# Altium PCB STM32RF_PCB.PcbDoc
Units mm, origin at the board's own origin, x right, y up, seen from the top; angles counter-clockwise.
Board outline 50 x 28.5 mm, 4 copper layers (Top Layer, Int1 (GND), Int2 (PWR), Bottom Layer), stack 1.586 mm thick; 72 components, 54 nets, 253 pads, 278 vias.
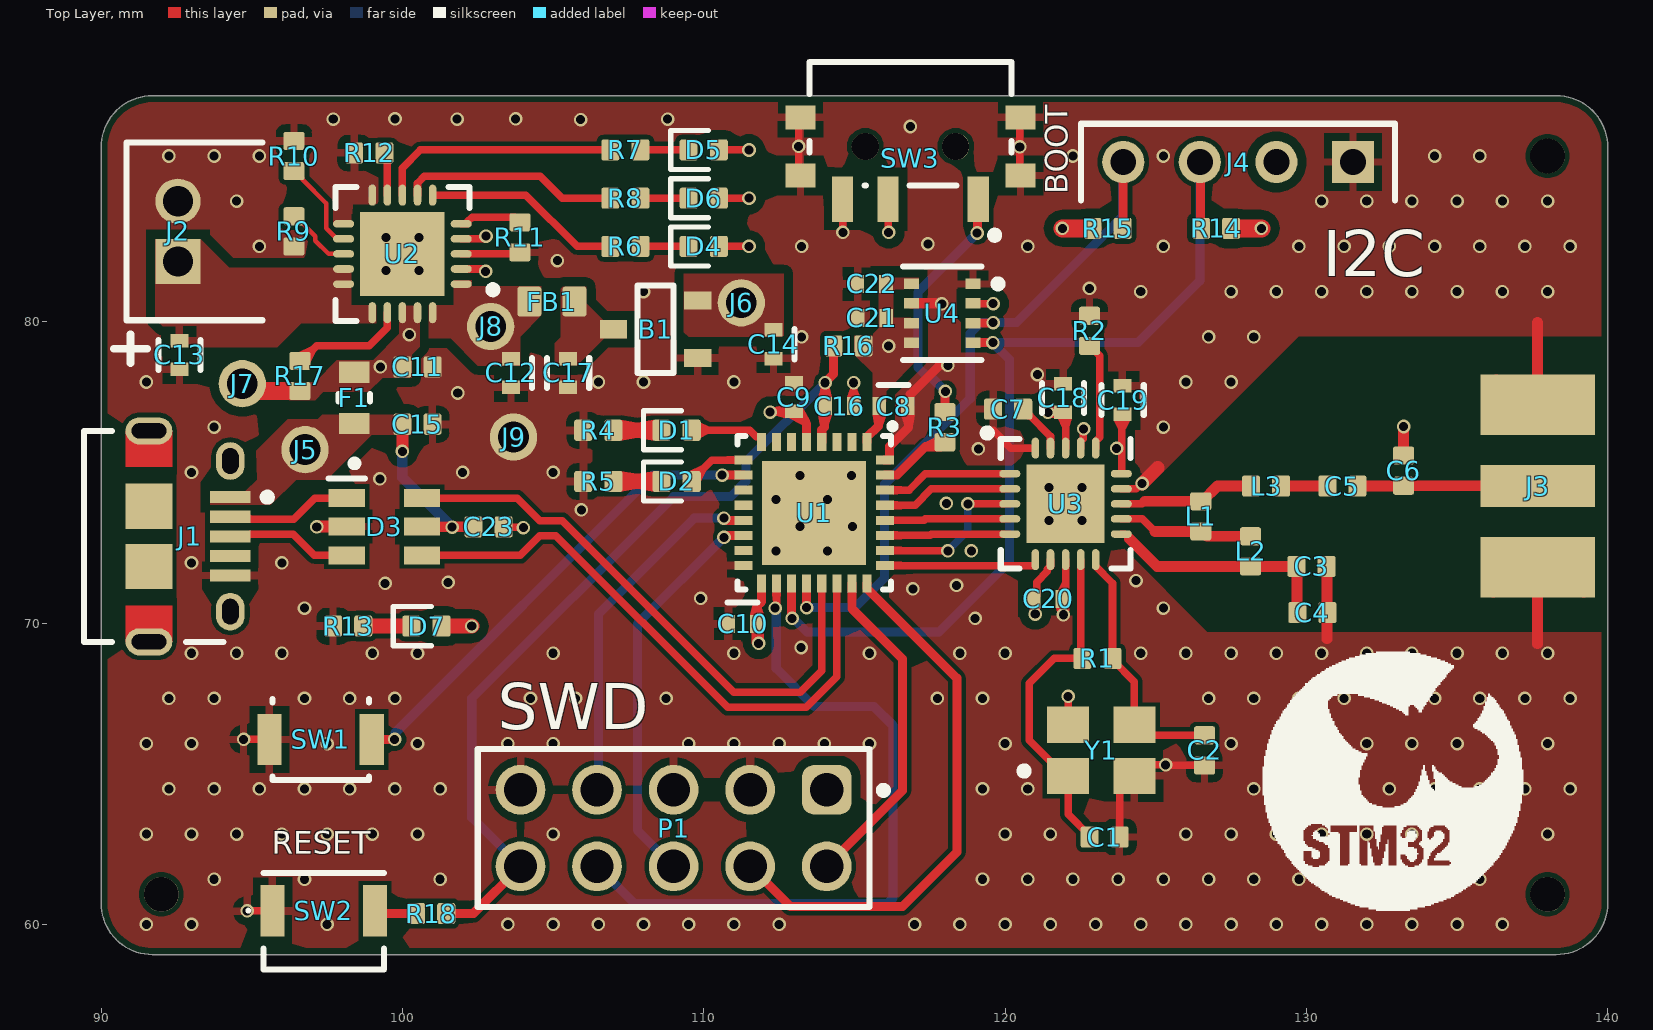
[diagram p0: Top Layer view]
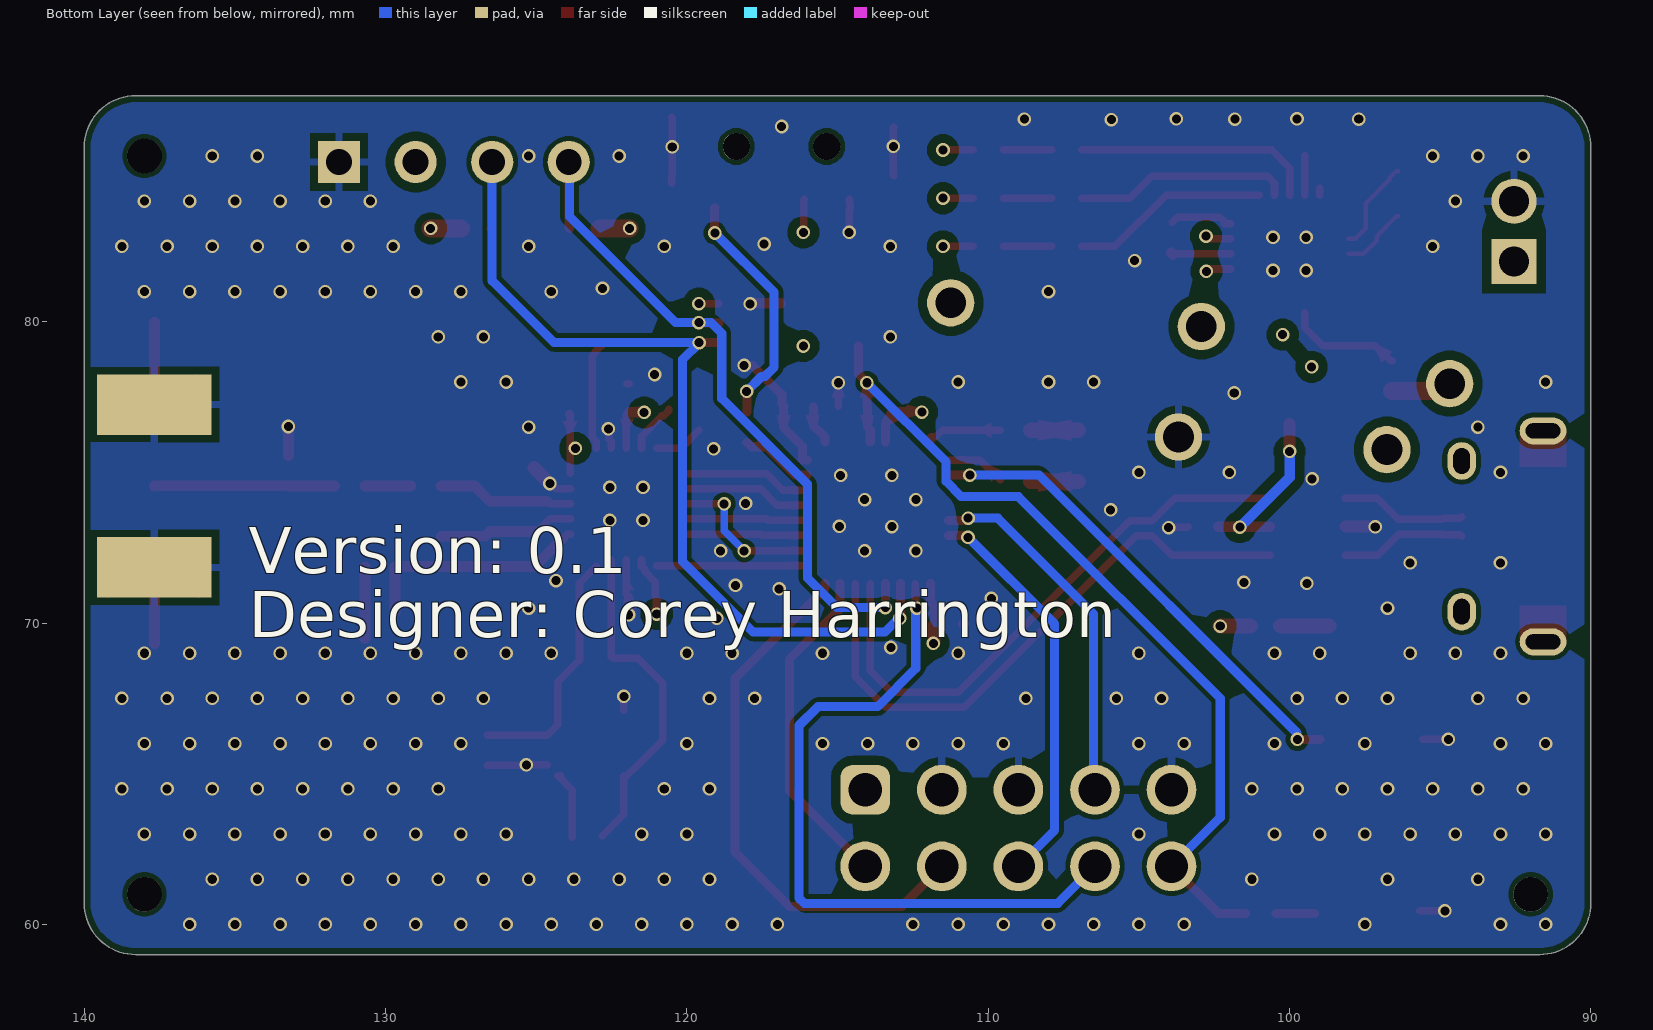
[diagram p1: Bottom Layer view, seen from below]
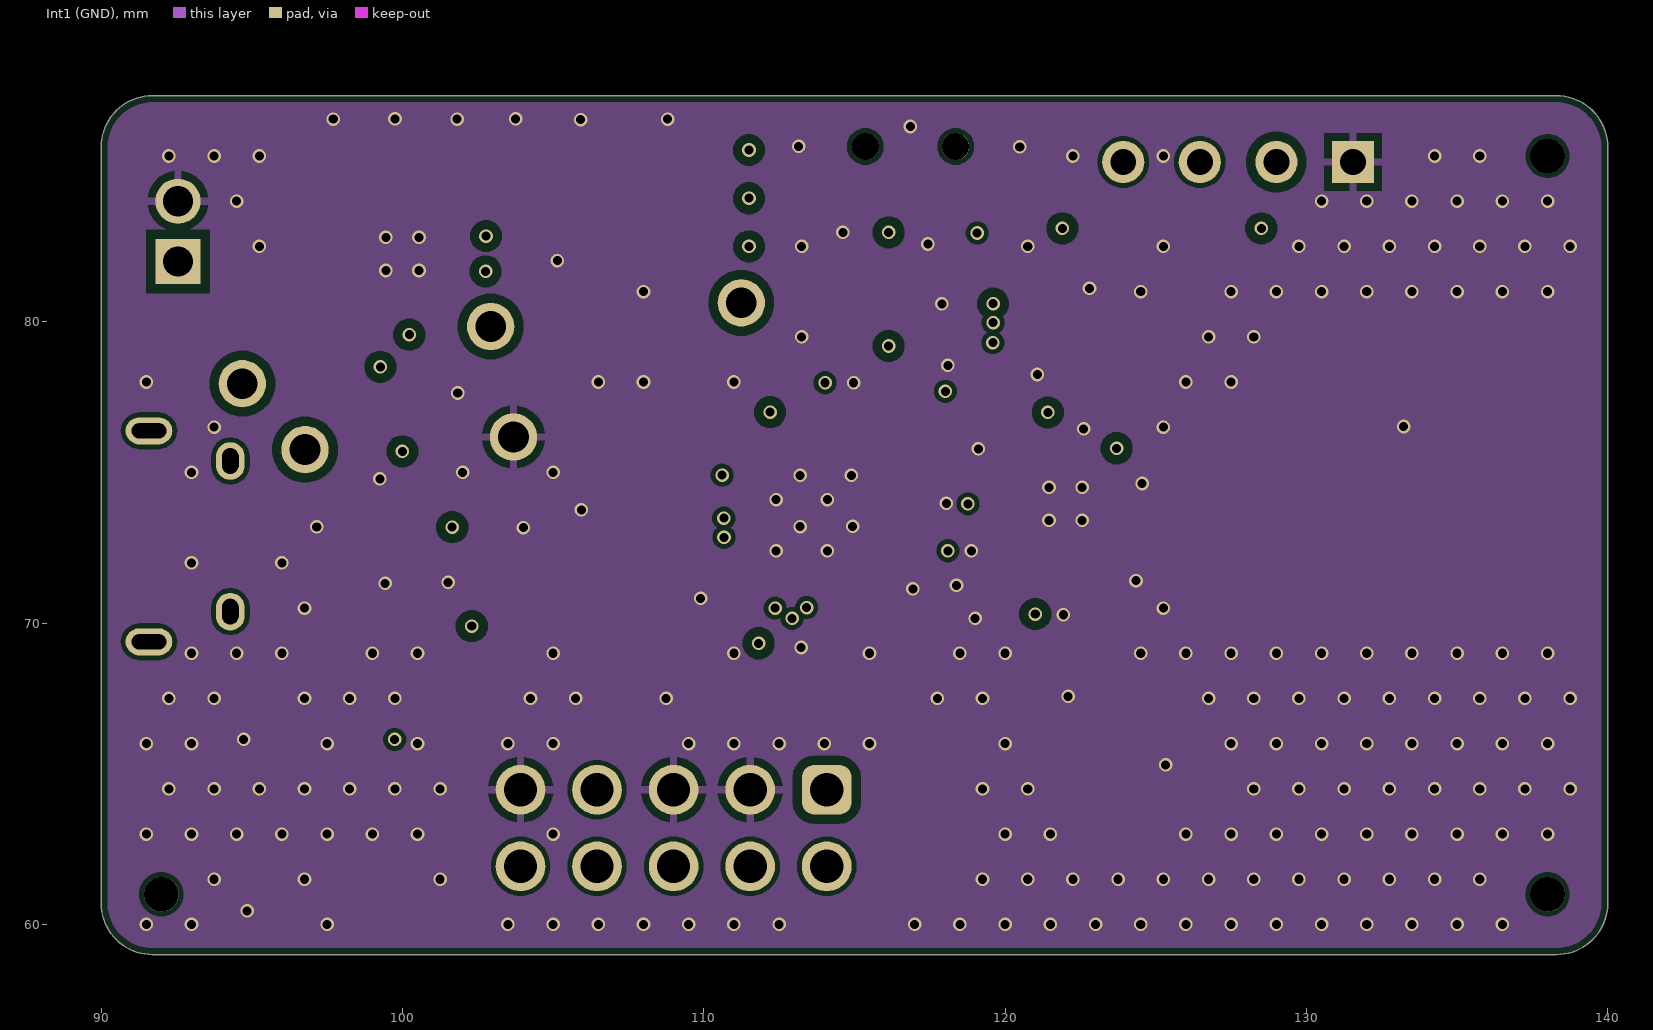
[diagram p2: Int1 (GND)]
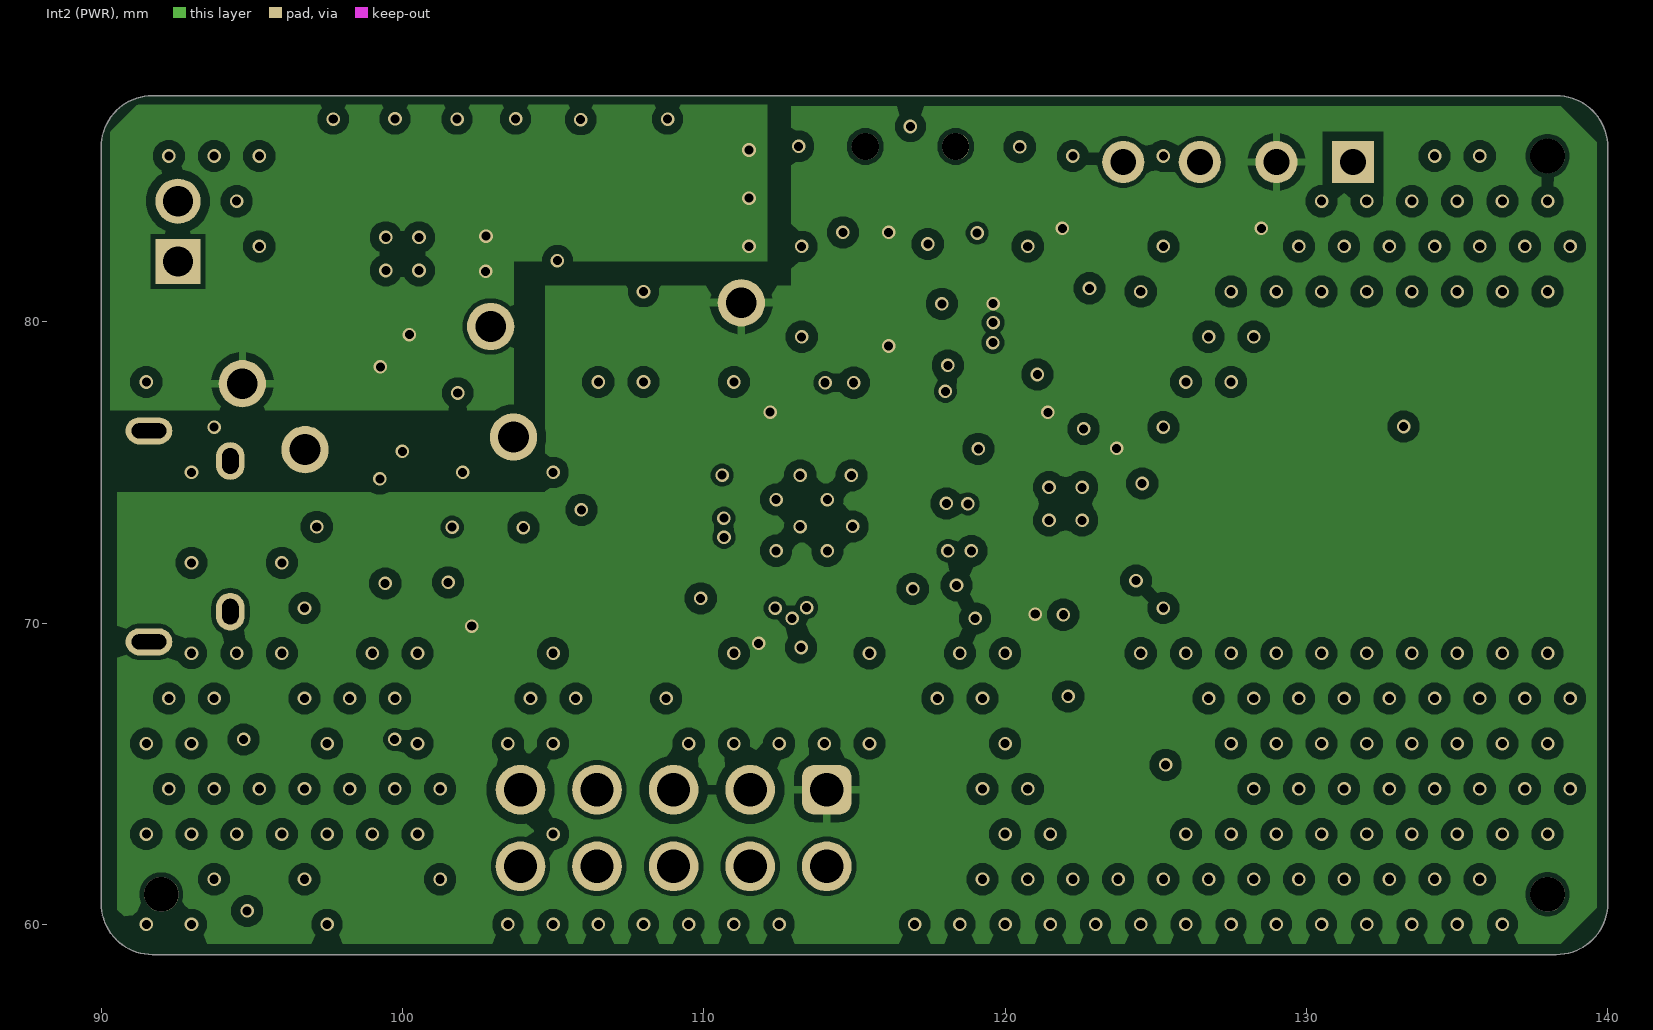
[diagram p3: Int2 (PWR)]
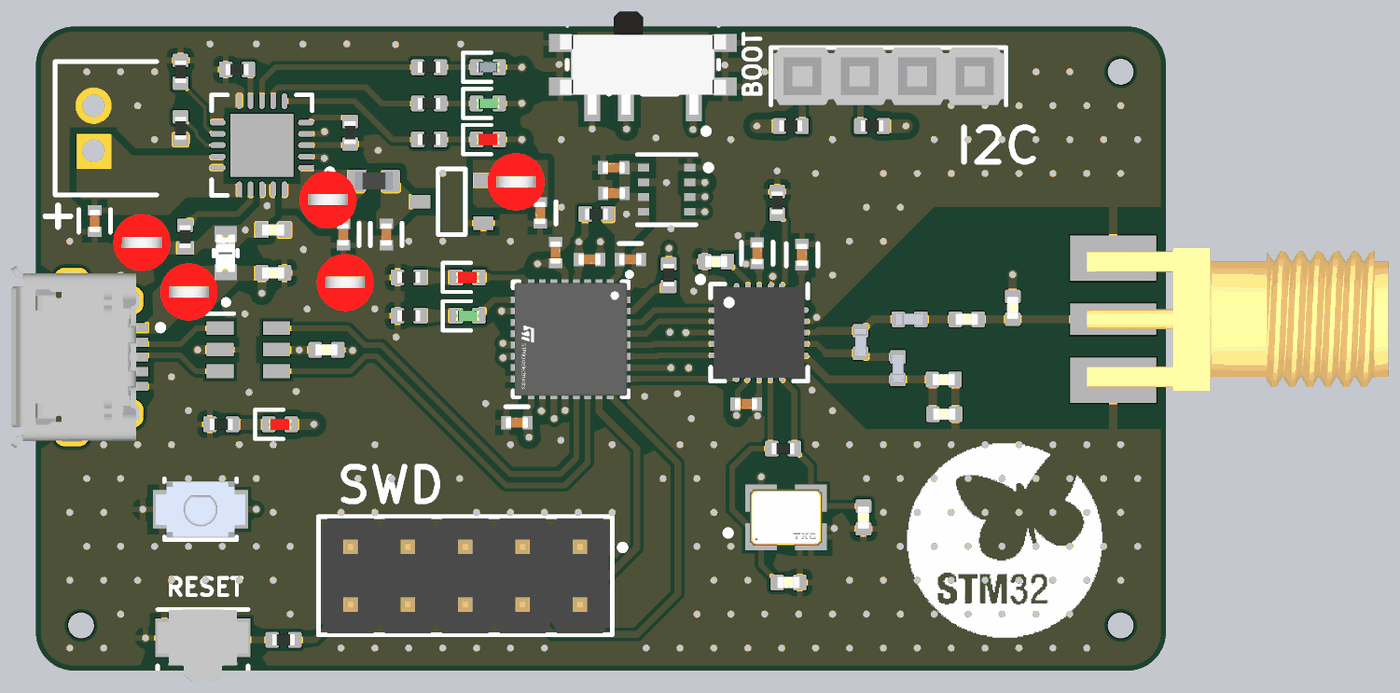
[diagram p4: 3D render of the assembled board from above, using the file's embedded part models]

## Layer stack, top to bottom
Top Solder: solder mask 0.0152, SM-001, Dk 3.8
Top Layer: signal copper 0.035
Dielectric 1: prepreg 0.2104, PP-023, Dk 4.4
Int1 (GND): signal copper 0.0152
Dielectric 3: core 1.065, Core-042, Dk 4.6
Int2 (PWR): signal copper 0.0152
Dielectric 5: prepreg 0.2104, PP-023, Dk 4.4
Bottom Layer: signal copper 0.035
Bottom Solder: solder mask 0.0152, SM-001, Dk 3.8

## Board outline
90.5,59.5 cw(c91.707,60.707) 90,60.707 90,85.793 cw(c91.707,85.793) 90.5,87 cw(c91.707,85.793) 91.707,87.5 138.293,87.5 cw(c138.293,85.793) 139.5,87 cw(c138.293,85.793) 140,85.793 140,60.707 cw(c138.293,60.707) 139.5,59.5 cw(c138.293,60.707) 138.293,59 91.707,59 cw(c91.707,60.707)

## Design rules (kind name [scope] priority, off if disabled: settings)
BoardOutlineClearance [All] p1: gap=0.22 ignorepadtopadclearanceinfootprint=FALSE
Clearance ClearanceGNDPoursPower_1 [InNet('GND') vs InNetClass('Power')] p1: gap=0.3 ignorepadtopadclearanceinfootprint=FALSE
Clearance [All] p2: gap=0.15 ignorepadtopadclearanceinfootprint=FALSE
DiffPairsRouting [All] p1: maxlimit=0.254 minlimit=0.203 mostfreqgap=0.254 toplayer_maxgap=0.203 toplayer_prefgap=0.203 toplayer_minwidth=0.253 toplayer_maxwidth=0.253 toplayer_prefwidth=0.253 bottomlayer_maxgap=0.203 bottomlayer_prefgap=0.203 bottomlayer_minwidth=0.253 bottomlayer_maxwidth=0.253 bottomlayer_prefwidth=0.253 impedanceprofiledriven=TRUE impedanceprofileid={286F65C9-C0EC-4DC8-95B2-A61B2A38E763} impedanceprofilevalue=90.000000 maxuncoupledlength=12.7
HoleSize [All] p1: absolutevalues=TRUE maxlimit=6.3 minlimit=0.19 maxpercent=80.000 minpercent=20.000
MatchedLengths [InDifferentialPair ('USB_D')] p1: tolerance=25.4 checknetsindiffpair=FALSE checkdiffpairvsdiffpair=TRUE checkxsignals=TRUE checkothers=TRUE
MinimumAnnularRing [All] p1: minimumring=0.07
MinimumSolderMaskSliver [All] p1: minsoldermaskwidth=0.11
PolygonConnect [All] p1: connectstyle=Relief reliefconductorwidth=0.254 reliefentries=4 polygonreliefangle="90 Angle" airgapwidth=0.254
RoutingVias [All] p1: holewidth=0.2 width=0.35 viastyle="Through Hole" minholewidth=0.2 minwidth=0.35 maxholewidth=6 maxwidth=6.15 viatemplateguid#1={0F43BBC7-26E7-4347-9C8E-C3F9A4934C02} viatemplatename#1=v35h15
SilkToSolderMaskClearance [IsPad] p1: minsilkscreentomaskgap=0.17 clearancetoexposedcopper=TRUE
SolderMaskExpansion SolderMaskExpansionMCP [InComponent('U2')] p1: expansion=0.025 istentingtop=FALSE
SolderMaskExpansion SolderMaskExpansionNRF [InComponent('U3')] p2: expansion=0.025 istentingtop=FALSE
SolderMaskExpansion [All] p3: expansion=0.05 istentingtop=FALSE
SupplyNets "Schematic Supply Nets_5" [InNet('VBUS')] p1: voltage=0.000
SupplyNets "Schematic Supply Nets_4" [InNet('GND')] p2: voltage=0.000
SupplyNets "Schematic Supply Nets_3" [InNet('VBUS_FUSED')] p3: voltage=0.000
SupplyNets "Schematic Supply Nets_2" [InNet('+3.3V')] p4: voltage=0.000
SupplyNets "Schematic Supply Nets_1" [InNet('VBUS_MCP_OUT')] p5: voltage=0.000
SupplyNets "Schematic Supply Nets" [InNet('VBAT')] p6: voltage=0.000
Width USB_FS [InNetClass('Differentials')] p1: maxlimit=0.254 minlimit=0.025 preferedwidth=0.254 toplayer_maxwidth=0.025 toplayer_prefwidth=0.025 bottomlayer_maxwidth=0.025 bottomlayer_prefwidth=0.025 impedanceprofiledriven=TRUE impedanceprofileid={286F65C9-C0EC-4DC8-95B2-A61B2A38E763} minimp=50.000000 maximp=50.000000 favimp=50.000000
Width 2.4GHzRF [InNetClass('2.4GHzRF')] p2: maxlimit=0.357 minlimit=0.254 preferedwidth=0.357 toplayer_minwidth=0.357 bottomlayer_minwidth=0.357 impedanceprofiledriven=TRUE impedanceprofileid={B9E9FB07-D802-41B6-95F4-58B4CA0E4322} impedanceprofilevalue=50.000000 minimp=50.000000 maximp=50.000000 favimp=50.000000
Width [All] p3: maxlimit=5 minlimit=0.12 preferedwidth=0.3 minimp=50.000000 maximp=50.000000 favimp=50.000000
26 further rules are at their usual default settings.

## Classes and differential pairs
net class Differentials: USB_CONN_D_N USB_CONN_D_P USB_D_N USB_D_P
net class Power: +3.3V VBAT VBUS VBUS_FILTERED VBUS_FUSED VBUS_MCP_OUT
net class 2.4GHzRF: ANT1 ANT2 ANT2_2 ANT2_SMA VDD_PA
component class U_STM32RF_PowerUSBSchDoc: B1 C11 C12 C13 C14 C15 C17 C23 D3 D4 D5 D6 D7 F1 FB1 J1 J2 J5 J6 J7 J8 J9 R6 R7 R8 R9 R10 R11 R12 R13 R17 U2
component class U_STM32RF_NRF: C1 C2 C3 C4 C5 C6 C7 C18 C19 C20 J3 L1 L2 L3 R1 R2 U3 Y1
component class U_STM32RF_MCU: C8 C9 C10 C16 D1 D2 P1 R3 R4 R5 R16 R18 SW1 SW2 SW3 U1
component class U_STM32RF_BME280: C21 C22 J4 R14 R15 U4
differential pair USB_D: +USB_D_P -USB_D_N
differential pair USB_CONN_D: +USB_CONN_D_P -USB_CONN_D_N

## Components (designator, comment, footprint, x,y, rotation, side; value= is the part's Value field where it differs from the comment)
B1 "XC6206P252MR-G" SOT95P280X130-3N 108.4,79.75 r180 top
C1 "22p" CAP_0402 123.3,62.9 r180 top
C2 "22p" CAP_0402 126.619,65.778 r90 top
C3 "2.2n" CAP_0402 130.167,71.882 r180 top
C4 "4.7p" CAP_0402 130.196,70.349 r180 top
C5 "1.5p" CAP_0402 131.191,74.549 r180 top
C6 "1.0p" CAP_0402 133.223,75.057 r270 top
C7 "33n" CAP_0402 120.1,77.1 r0 top
C8 "22uF" FP-GRM158-0_2-MFG 116.3,77.2 r0 top
C9 "22uF" FP-GRM158-0_2-MFG 113,77.5 r90 top
C10 "22uF" FP-GRM158-0_2-MFG 111.285,69.977 r180 top
C11 "4.7u" CAP_0402 100.5,78.5 r180 top
C12 "22uF" FP-GRM158-0_2-MFG 103.6,78.3 r270 top
C13 "22uF" FP-GRM158-0_2-MFG 92.6,78.9 r270 top
C14 "22uF" FP-GRM158-0_2-MFG 112.313,79.253 r270 top
C15 "4.7u" CAP_0402 100.5,76.6 r180 top
C16 "22uF" FP-GRM158-0_2-MFG 114.5,77.2 r0 top
C17 "22uF" FP-GRM158-0_2-MFG 105.5,78.3 r270 top
C18 "22uF" FP-GRM158-0_2-MFG 121.92,77.47 r90 top
C19 "22uF" FP-GRM158-0_2-MFG 123.9,77.4 r90 top
C20 "22uF" FP-GRM158-0_2-MFG 121.425,70.8 r0 top
C21 "22uF" FP-GRM158-0_2-MFG 115.579,80.128 r180 top
C22 "22uF" FP-GRM158-0_2-MFG 115.571,81.256 r180 top
C23 "100n" CAP_0402 102.859,73.195 r180 top
D1 "RED" LED_0402_RED 109.1,76.4 r180 top
D2 "GREEN" LED_0402_GREEN 109.1,74.7 r180 top
D3 "USBLC6-2SC6Y" SOT95P280X145-6N 99.4,73.2 r0 top
D4 "RED" LED_0402_RED 110,82.5 r180 top
D5 "BLUE" LED_0402_BLUE 110,85.7 r180 top
D6 "GREEN" LED_0402_GREEN 110,84.1 r180 top
D7 "RED" LED_0402_RED 100.8,69.9 r180 top
F1 "MF-FSMF050X-2" FP-MF-FSMF-MFG 98.4,77.475 r90 top value=0.1-0.8Ω
FB1 "100 @ 100MHz" FB_0603 104.961,80.67 r0 top
J1 "10118194-0001LF" FCI-10118194-0001LF-5_V 92.939,72.879 r270 top
J2 "B2B-PH-K-S(LF)(SN)" JST-B2B-PH-K-S_V 93.1,83 r90 top
J3 "CON-SMA-EDGE-S" CON-SMA-EDGE-S 137.668,74.549 r0 top
J4 "SLW-104-01-F-S" SMTC-SLW-104-01-X-S 131.54,85.3 r180 top
J5 "5000" FP-5000-MFG 96.77,75.757 r0 top
J6 "5000" FP-5000-MFG 111.245,80.628 r0 top
J7 "5000" FP-5000-MFG 94.689,77.945 r0 top
J8 "5000" FP-5000-MFG 102.928,79.843 r0 top
J9 "5000" FP-5000-MFG 103.687,76.173 r0 top
L1 "8.2n" IND_0402 126.492,73.541 r90 top
L2 "2.7n" IND_0402 128.143,72.382 r270 top
L3 "3.9n" IND_0402 128.659,74.549 r0 top
P1 "61301021121" 61301021121 109,63.2 r180 top
R1 "1M" RES_0402 123.063,68.826 r0 top
R2 "22K" RES_0402 122.8,79.7 r270 top
R3 "10K" RES_0402 118,76.5 r270 top
R4 "2K" RES_0402 106.5,76.4 r0 top
R5 "1K" RES_0402 106.5,74.7 r0 top
R6 "470" RES_0402 107.4,82.5 r0 top
R7 "470" RES_0402 107.4,85.7 r0 top
R8 "470" RES_0402 107.4,84.1 r0 top
R9 "2K" RES_0402 96.4,83 r90 top
R10 "20K" RES_0402 96.4,85.5 r270 top
R11 "10K" RES_0402 103.9,82.8 r90 top
R12 "10K" RES_0402 98.9,85.6 r0 top
R13 "2K" RES_0402 98.2,69.9 r0 top
R14 "3.3K" RES_0402 127,83.1 r0 top
R15 "3.3K" RES_0402 123.4,83.1 r180 top
R16 "10K" RES_0402 114.8,79.2 r0 top
R17 "10K" RES_0402 96.6,78.2 r270 top
R18 "100" RES_0402 100.955,60.363 r180 top
SW1 "B3U-1000P" FP-B3U-1000P-MFG 97.283,66.139 r0 top
SW2 "B3U-3000P" OMRON-B3U-3000P_V 97.388,60.457 r0 top
SW3 "PCM12SMTR" FP-PCM12SMTR-MFG 116.859,86.564 r180 top
U1 "STM32L432KBU6" FP-UFQFPN32-A0B8-MFG 113.665,73.66 r270 top
U2 "MCP73871-3CCI/ML" QFN-ML20_L 100,82.25 r180 top
U3 "NRF24L01P-T" NRSC-QFN-20_L 122.005,73.956 r0 top
U4 "BME280" FP-BME280-MFG 117.912,80.282 r0 top
Y1 "7M16000017" FP-7M-MFG 123.19,65.778 r0 top

## Footprints (in the part's own frame and the unit in brackets; to place one, negate y for a bottom-side part, rotate by r counter-clockwise, add the part's x,y. Pads: shape width x height; smd on the part's side, far side on the other; paste and mask are expansions set on the pad)
61301021121 [mm] "Pin Header, pitch 2.54 mm, THT, Vertical, dual row, 10p"
  rrect50% 1.65x1.65 hole 1.1: 1(-5.08,-1.27)
  round 1.65 hole 1.1: 2(-5.08,1.27) 3(-2.54,-1.27) 4(-2.54,1.27) 5(0,-1.27) 6(0,1.27) 7(2.54,-1.27) 8(2.54,1.27) 9(5.08,-1.27) 10(5.08,1.27)
  silkscreen extent -7.08,-2.62 6.5,2.62, body extent -6.35,-2.54 6.35,2.54, height 8.59
CAP_0402 [mm]
  rrect25% 0.6x0.7 smd: 1(-0.5,0) 2(0.5,0)
  body extent -0.5,-0.26 0.5,0.26, height 0.37
CON-SMA-EDGE-S [mm]
  rect 3.8x1.4 smd mask+0.07: 1(0,0)
  rect 3.8x2 smd mask+0.07: 2(0,-2.7) 2(0,2.7)
  rect 3.8x2 smd far side mask+0.07: 2(0,-2.7) 2(0,2.7)
  body extent -1.16,-3.17 12.17,3.17, height 3.64
FB_0603 [mm]
  rrect25% 0.8x1 smd: 1(-0.75,0) 2(0.75,0)
  body extent -0.8,-0.4 0.8,0.4, height 0.81
FCI-10118194-0001LF-5_V [mm] "SMD, 5-Leads, Body 7x5mm, Pitch 0.65 mm"
  rect 0.4x1.35 smd: 1(-1.3,1.35) 2(-0.65,1.35) 3(0,1.35) 4(0.65,1.35) 5(1.3,1.35)
  oval 1.25x0.95 hole 0.55 slot 0.85 at 0 deg: 6(-2.5,1.35) 7(2.5,1.35)
  oval 0.9x1.55 hole 0.5 slot 1.15 at 90 deg: 8(-3.5,-1.35) 9(3.5,-1.35)
  rect 1.5x1.55 smd: 10(-1,-1.35) 11(1,-1.35)
  Top Layer region: 3.5,-2.125 3.5,-0.575 2.3,-0.575 2.3,-2.125
  Top Layer region: -2.3,-2.125 -2.3,-0.575 -3.5,-0.575 -3.5,-2.125
  silkscreen extent -3.5,-3.5 3.5,2.7, body extent -4.02,-4.03 4.02,1.55, height 2.72
FP-7M-MFG [mm]
  rect 1.4x1.2 smd paste+0 mask+0: 1(-1.1,-0.85) 2(1.1,-0.85) 3(1.1,0.85) 4(-1.1,0.85)
  silkscreen extent -2.68,-0.81 -2.43,-0.56, body extent -1.9,-1.55 1.9,1.55, height 0.25
FP-5000-MFG [mm]
  round 1.57 hole 1.02 paste-2539.97 mask+0: 1(0,0)
  body extent -1.45,-1.45 1.45,1.45, height 0.25
FP-B3U-1000P-MFG [mm]
  rect 0.8x1.7 smd paste+0 mask+0: 1(-1.7,0) 2(1.7,0)
  silkscreen extent -1.6,-1.35 1.6,1.35, body extent -2.2,-1.45 2.2,1.45, height 0.25
FP-BME280-MFG [mm]
  rect 0.5x0.35 smd paste+0 mask+0: 1(1.025,0.975) 2(1.025,0.325) 3(1.025,-0.325) 4(1.025,-0.975) 5(-1.025,-0.975) 6(-1.025,-0.325) 7(-1.025,0.325) 8(-1.025,0.975)
  silkscreen extent -1.3,-1.55 1.97,1.55
FP-GRM158-0_2-MFG [mm]
  rect 0.45x0.6 smd paste+0 mask+0: 1(-0.475,0) 2(0.475,0)
  silkscreen extent -0.5,0.7 0.5,0.7, body extent -0.8,-0.45 0.8,0.45, height 0.25
FP-MF-FSMF-MFG [mm]
  rect 0.7x1 smd paste+0 mask+0: 1(-0.85,0) 2(0.85,0)
  silkscreen extent -0.13,-0.53 0.13,0.53, body extent -1.3,-0.63 1.3,0.63, height 0.25
FP-PCM12SMTR-MFG [mm]
  rect 0.7x1.5 smd paste+0 mask+0: 1(-2.25,2.5) 2(0.75,2.5) 3(2.25,2.5)
  rect 1x0.8 smd paste+0 mask+0: 4(-3.65,1.715) 5(3.65,1.715) 6(-3.65,-0.215) 7(3.65,-0.215)
  round 0.9 hole 0.9 unplated paste-2539.97 mask+0: ""(-1.5,0.75) ""(1.5,0.75)
  silkscreen extent -3.35,-2.05 3.35,3.82, body extent -3.68,-1.61 3.67,2.97, height 1.4
FP-UFQFPN32-A0B8-MFG [mm]
  rect 0.6x0.3 smd paste+0 mask+0: 1(-2.35,1.75) 2(-2.35,1.25) 3(-2.35,0.75) 4(-2.35,0.25) 5(-2.35,-0.25) 6(-2.35,-0.75) 7(-2.35,-1.25) 8(-2.35,-1.75) 17(2.35,-1.75) 18(2.35,-1.25) 19(2.35,-0.75) 20(2.35,-0.25) 21(2.35,0.25) 22(2.35,0.75) 23(2.35,1.25) 24(2.35,1.75)
  rect 0.3x0.6 smd paste+0 mask+0: 9(-1.75,-2.35) 10(-1.25,-2.35) 11(-0.75,-2.35) 12(-0.25,-2.35) 13(0.25,-2.35) 14(0.75,-2.35) 15(1.25,-2.35) 16(1.75,-2.35) 25(1.75,2.35) 26(1.25,2.35) 27(0.75,2.35) 28(0.25,2.35) 29(-0.25,2.35) 30(-0.75,2.35) 31(-1.25,2.35) 32(-1.75,2.35)
  rect 3.45x3.45 smd paste+0 mask+0: 33(0,0)
  silkscreen extent -2.95,-2.55 2.55,2.67, body extent -2.75,-2.75 2.75,2.75, height 0.25
IND_0402 [mm]
  rrect25% 0.6x0.7 smd: 1(-0.5,0) 2(0.5,0)
  body extent -0.56,-0.26 0.56,0.26, height 0.67
JST-B2B-PH-K-S_V [mm] "Connector, 2-Leads, Body 5.9x4.5mm, Pitch 2mm"
  rect 1.5x1.5 hole 1: 1(-1,0.55)
  round 1.5 hole 1: 2(1,0.55)
  silkscreen extent -2.95,-2.25 2.95,2.25, body extent -2.95,-2.25 2.95,2.25, height 6
LED_0402_BLUE [mm]
  rrect25% 0.6x0.7 smd: A(-0.5,0) K(0.5,0)
  silkscreen extent -0.15,-0.65 1.1,0.65, body extent -0.51,-0.25 0.51,0.25, height 0.45
LED_0402_GREEN [mm]
  rrect25% 0.6x0.7 smd: A(-0.5,0) K(0.5,0)
  silkscreen extent -0.15,-0.65 1.1,0.65, body extent -0.51,-0.25 0.51,0.25, height 0.45
LED_0402_RED [mm]
  rrect25% 0.6x0.7 smd: A(-0.5,0) K(0.5,0)
  silkscreen extent -0.15,-0.65 1.1,0.65, body extent -0.51,-0.25 0.51,0.25, height 0.45
NRSC-QFN-20_L [mm] "QFN, 20-Leads, Body 4x4mm, Pitch 0.5mm, Thermal Pad 2.6x2.6mm, IPC High Density"
  oval 0.7x0.25 smd: 1(-1.85,1) 2(-1.85,0.5) 3(-1.85,0) 4(-1.85,-0.5) 5(-1.85,-1) 11(1.85,-1) 12(1.85,-0.5) 13(1.85,0) 14(1.85,0.5) 15(1.85,1)
  oval 0.25x0.7 smd: 6(-1,-1.85) 7(-0.5,-1.85) 8(0,-1.85) 9(0.5,-1.85) 10(1,-1.85) 16(1,1.85) 17(0.5,1.85) 18(0,1.85) 19(-0.5,1.85) 20(-1,1.85)
  rect 2.6x2.6 smd: 21(0,0)
  silkscreen extent -2.72,-2.15 2.15,2.48, body extent -2,-2 2,2, height 0.95
OMRON-B3U-3000P_V [mm] "SMD, 2-Leads, Body 4x3.2mm"
  rect 0.8x1.7 smd: 1(-1.7,0) 2(1.7,0)
  silkscreen extent -2.55,-1.95 2,1.25, body extent -2,-1.95 2,1.25, height 1.2
QFN-ML20_L [mm] "QFN, 20-Leads, Body 4x4mm, Pitch 0.5mm, Thermal Pad 2.8x2.8mm, IPC High Density"
  oval 0.7x0.25 smd: 1(-1.95,1) 2(-1.95,0.5) 3(-1.95,0) 4(-1.95,-0.5) 5(-1.95,-1) 11(1.95,-1) 12(1.95,-0.5) 13(1.95,0) 14(1.95,0.5) 15(1.95,1)
  oval 0.25x0.7 smd: 6(-1,-1.95) 7(-0.5,-1.95) 8(0,-1.95) 9(0.5,-1.95) 10(1,-1.95) 16(1,1.95) 17(0.5,1.95) 18(0,1.95) 19(-0.5,1.95) 20(-1,1.95)
  rect 2.8x2.8 smd: 21(0,0)
  silkscreen extent -3.13,-2.22 2.23,2.23, body extent -2.07,-2.07 2.08,2.08, height 1
RES_0402 [mm]
  rrect25% 0.6x0.7 smd: 1(-0.5,0) 2(0.5,0)
  body extent -0.5,-0.25 0.5,0.25, height 0.3
SMTC-SLW-104-01-X-S [mm] "Low Profile Socket Strip, 1x4 Pins, Vertical, 2.54mm Pitch, Female"
  rect 1.4x1.4 hole 0.86: 1(0,0)
  round 1.4 hole 0.86: 2(2.54,0) 3(5.08,0) 4(7.62,0)
  silkscreen extent -1.4,-1.27 9.02,1.27, body extent -1.27,-1.27 8.89,1.27, height 4.57
SOT95P280X130-3N [mm]
  rect 0.9x0.6 smd: 1(-1.4,0.95) 2(-1.4,-0.95) 3(1.4,0)
  silkscreen extent -0.6,-1.45 0.6,1.45
SOT95P280X145-6N [mm]
  rect 1.2x0.6 smd: 1(-1.25,0.95) 2(-1.25,0) 3(-1.25,-0.95) 4(1.25,-0.95) 5(1.25,0) 6(1.25,0.95)
  silkscreen extent -1.85,1.6 -0.65,1.6

## Part data
B1: "LDO Voltage Regulators 1uA Low Quiescent 3 Terminal, Low ESR Cap. Compatible, Voltage Regulator", Manufacturer_Name=Torex, Mouser Part Number=865-XC6206P252MR-G, Datasheet Link=https://www.torexsemi.com/file/xc6206/XC6206.pdf, Geometry.Height=1.3mm, Manufacturer_Part_Number=XC6206P252MR-G, Mouser Price/Stock=https://www.mouser.co.uk/ProductDetail/Torex-Semiconductor/XC6206P252MR-G?qs=AsjdqWjXhJ%2FThrLMef8qfg%3D%3D
C1 C2 C3 C4 C5 C6 C7: library part CAP_0402, "Capacitor SMD 0402"
C8 C9 C10 C12 C13 C14 C16 C17 C18 C19 C20 C21 C22: library part CMP-06035-020400-1, "Chip Multilayer Ceramic Capacitors for General Purpose, 0402, 22uF, X5R, 15%, 20%, 10V"
C11 C15 C23: library part CAP_0402, "Capacitor SMD 0402", Manufacturer="Murata Electronics", Manufacturer Part Number=GRM155R61E475ME15D
D1 D4 D7: library part LED_0402_RED, "LED 0402 RED SMD"
D2 D6: library part LED_0402_GREEN, "LED 0402 GREEN SMD"
D3: "Low Cap. ESD Protection Auto SOT-23-6 STMicroelectronics USBLC6-2SC6Y, Dual Uni-Directional TVS Diode Array, 6-Pin SOT-23", Manufacturer_Name=STMicroelectronics, Mouser Part Number=511-USBLC6-2SC6Y, Arrow Part Number=USBLC6-2SC6Y, Arrow Price/Stock=https://www.arrow.com/en/products/usblc6-2sc6y/stmicroelectronics?utm_currency=USD&region=nac, Datasheet Link=https://www.st.com/resource/en/datasheet/usblc6-2sc6y.pdf, Geometry.Height=1.45mm, Manufacturer_Part_Number=USBLC6-2SC6Y, Mouser Price/Stock=https://www.mouser.co.uk/ProductDetail/STMicroelectronics/USBLC6-2SC6Y?qs=gNDSiZmRJS%2FOgDexvXkdow%3D%3D
D5: library part LED_0402_BLUE, "LED 0402 BLUE SMD"
F1: library part CMP-07400-000010-1, "PTC RESET FUSE 6V 500MA 0603", Ambient Temperature Range High=+85°C, Ambient Temperature Range Low=-40°C, Current Rating=40A, Hold Current=0.5A, Manufacturer="Bourns Inc.", Package=MF-FSMF, Resistance=0.1-0.8Ω, Temperature="-40°C to +85°C", Trip Current=1A, Voltage Rating=6V, Automotive=No, Category=Fuse, ComponentLink2Description=Datasheet, ComponentLink2URL=https://www.bourns.com/docs/Product-Datasheets/mffsmf.pdf, Device Class L1="Circuit Protection", Device Class L2="PTC Resettable Fuses", Device Class L3=unset, Digikey Description="PTC RESET FUSE 6V 500MA 0603", Height=1mm, Lead Free=Yes, Manufacturer Part Number=MF-FSMF050X-2, Mouser Description="Resettable Fuses - PPTC 6volts 40amps", Octopart=https://octopart.com/mf-fsmf050x-2-bourns-10470804, RoHS=TRUE, Temperature Range High=+85°C, Temperature Range Low=-40°C, Trip Time=0.1s
FB1: library part FB_0603, "Ferrite Bead SMD 0603"
J1: library part CMP-2000-05120-1, "Micro USB B Type Receptacle, 1.8 A, -55 to 85 degC, 5-Pin SMD, RoHS, Tape and Reel", Manufacturer="Amphenol FCI", Package Description="5-Pin Surface Mount Device, Body 8.05 x 5.53 mm, Pitch 0.65 mm", Package Reference=10118194-0001LF-5, Body Orientation=RightAngle, Datasheet URL=https://datasheet.ciiva.com/26945/getdatasheetpartid-418619-26945695.pdf, Datasheet Version="Rev. A, 10/2011", Gender=RCP, Manufacturer URL=http://www.fci.com/, Mounting=SurfaceMount, Number Of Contacts=5, Packaging=CutTape, Pitch=0.65mm, Rad Hard=No, Termination Method=Solder, Type=MicroUSBTypeB
J2: library part CMP-2000-05162-1, "Male Header, Pitch 2 mm, 1 x 2 Position, Height 6 mm, Tail Length 3.4 mm, -25 to 85 degC, RoHS, Bulk", Manufacturer=JST, Datasheet URL=http://datasheet.octopart.com/B2B-PH-K-S%28LF%29%28SN%29-JST-datasheet-8324864.pdf, Datasheet Version=Nov-08, Manufacturer URL=http://www.jst.com/home2.html, No of Positions=2, Pitch=2mm, Style/Orientation=StraightHeader/Plug, Termination=Crimp, Type=ShroudedHeader
J3: "RF Connector SMA Female 50 Ohms 18 GHz PCB Edge Mount", Manufacturer="RF Solutions", Manufacturer Part Number=CON-SMA-EDGE-S
J4: library part CMP-1023-00132-1, "Low Profile Socket Strips, Through-hole, Vertical, -55 to 125 degC, 2.54 mm Pitch, 4-Pin, Female, RoHS", Manufacturer=Samtec, Temperature Range="-55 to 125 degC", ComponentLink1Description="Manufacturer URL", ComponentLink1URL=http://www.samtec.com, ComponentLink2Description=Datasheet, ComponentLink2URL=http://www.samtec.com/documents/webfiles/pdf/SLW.PDF, ComponentLink3Description="Package Specification", ComponentLink3URL=http://www.samtec.com/documents/webfiles/cpdf/SLW-1XX-01-X-X-MKT.pdf, DatasheetVersion=F-214, Mounting Technology=Through-hole, Orientation=Vertical, PackageDescription="Low Profile Socket Strip", PackageReference=SLW-104-01-X-S, PackageVersion="X, 9/1987", PartNumber=SLW-104-01-F-S, Pitch="2.54 mm", RoHS=True
J5 J6 J7 J8 J9: library part CMP-19636-000027-1, "PC TEST POINT MINIATURE RED", Color=Red, Flammability Rating="UL94 V-0", Package Quantity=100, Body Material=Bronze, Contact Material=Bronze, Contact Plating=Tin, Height=0.3inch, Hole Diameter=1.6mm, Housing Color=Red, Inside Diameter=1.27mm, Insulation=Insulated, Lead Free="Lead Free", Length=7.62mm, Material=Nylon, Mount=PCB, Number Of Contacts=1, Number of Ports=1, Orientation=Straight, Outside Diameter=2.54mm, Packaging=Bulk, Plating=Silver, REACH SVHC="No SVHC", RoHS Compliant=Yes, Series=THM
L1 L2 L3: library part IND_0402, "Inductor SMD 0402"
P1: library part CMP-1502-01084-4, "THT Vertical Pin Header WR-PHD, Pitch 2.54 mm, Dual Row, 10 pins", Color=Black, Contact Resistance=20mΩ, Current Rating=3A, Flammability Rating="UL94 V-0", Insulation Resistance=1GΩ, Max Operating Temperature=105°C, Min Operating Temperature=-40°C, Operating Supply Voltage=250V, Connector Type="Male Pin", Contact Gender=Male, Contact Material=Gold, Contact Mating Length=5.9944mm, Contact Plating=Gold, Gender=Male, Height=8.89mm, Housing Material=PBT, Insulation=Insulated, Lead Pitch=2.54mm, Length=12.7mm, Mount="Through Hole", Number Of Contacts=10, Number of Pins=10, Number of Positions=10, Number of Rows=2, Orientation=Vertical, Packaging=Bulk, Pitch=2.54mm, RoHS=Compliant, Row Spacing=2.54mm, Termination="Through Hole", Voltage Rating=250V, Width=12.7mm
R1 R2 R3 R4 R5 R6 R7 R8 R9 R10 R11 R12 R13 R14 R15 R16 R17 R18: library part RES_0402, "Resistor SMD 0402"
SW1: library part CMP-2100-03586-2, "SWITCH TACTILE SPST-NO 0.05A 12V", Contact Current Rating=50mA, Contact Resistance=100mR, Insulation Resistance=100MR, Max Operating Temperature=70°C, Max Voltage Rating (DC)=12V, Min Operating Temperature=-25°C, Operating Force=1.5N, Package Quantity=1, Ratings="Dust Proof", Actuator Length=0.4mm, Actuator Type=Standard, Contact Material=Silver, Current Rating=50mA, Depth=2.5mm, Electrical Life=200000Cycles, Height=1.2mm, Illumination Type=Non-Illuminated, Lead Free="Lead Free", Length=4mm, Max Current Rating=50mA, Mechanical Life=200000Cycles, Mount="Surface Mount", Orientation=Straight, Packaging="Tape and Reel", Switch Function=Off-Mom, Switch Travel=0.15mm, Termination=SMD/SMT, Throw Configuration=SPST, Voltage Rating (DC)=12V, Weight=0.000776oz, Width=3mm
SW2: library part CMP-1677-00003-1, "Ultra-Small Tactile Switch, 1 to 50 mA, 3 to 12 V, -25 to 70 degC, 2-Pin SMD, RoHS, Tape and Reel", Capacitance="470 uF", Case\Package=Radial, Max Operating Temperature="85 degC", Min Operating Temperature="-40 degC", Package Quantity=200, Tolerance=20%, Voltage Rating="50 V", ComponentLink1Description="Manufacturer URL", ComponentLink1URL=http://www.omron.com/, ComponentLink2Description=Datasheet, ComponentLink2URL=https://www.omron.com/ecb/products/pdf/en-b3u.pdf, DatasheetVersion=Jan-15, Diameter="10 mm", Height="20 mm", Lead Pitch="5 mm", Length="20 mm", Mount="Through Hole", PackageDescription="2-Pin Surface Mount Device, Body 4 x 3.2 mm", PackageReference=B3U-3000P, Packaging=Bulk, Pins=2, Radiation Hardening=No, REACH SVHC="No SVHC", RoHSCompliant=true, Voltage Rating (DC)="50 V"
SW3: library part CMP-2000-06884-2, "SWITCH SLIDE SPDT 300MA 6V", Contact Current Rating=300mA, Contact Resistance=70mR, Insulation Resistance=100mR, Max Operating Temperature=85°C, Max Voltage Rating (DC)=6V, Min Operating Temperature=-20°C, Package Quantity=1, Actuator Length=1.5mm, Actuator Material=Nylon, Actuator Type=Standard, Contact Material="Copper Alloy", Contact Plating=Silver, Current Rating=300mA, Depth=5mm, Lead Free="Lead Free", Length=7.7mm, Max Current Rating=300mA, Mechanical Life=10000Cycles, Mount="Surface Mount", Orientation="Right Angle", Packaging="Tape and Reel", REACH SVHC="No SVHC", Switch Function=On-On, Switch Travel=1.5mm, Termination="Gull Wing", Throw Configuration=SPDT, Voltage Rating (AC)=6V, Voltage Rating (DC)=6V, Width=6.7mm
U1: library part CMP-12105-000014-1, "IC MCU 32BIT 128KB FLASH 32QFPN", Ambient Temperature Range High=+85°C, Ambient Temperature Range Low=-40°C, Frequency=80MHz, Manufacturer=STMicroelectronics, Max Junction Temp=+105°C, Max Supply Voltage=3.6V, Min Supply Voltage=1.62V, Package=UFQFPN32-A0B8, Temperature="-40°C to +85°C", Automotive=No, Category=IC, ComponentLink2Description=Datasheet, ComponentLink2URL=https://www.st.com/resource/en/datasheet/stm32l432kb.pdf, Core Architecture="ARM Cortex-M4", Data Bus Width=32bits, Device Class L1="Integrated Circuits (ICs)", Device Class L2="Embedded Processors and Controllers", Device Class L3=Microcontrollers, Digikey Description="IC MCU 32BIT 128KB FLASH 32QFPN", Height=0.6mm, Interface=I2C,SPI,UART,USART,USB,IrDA, Ipc Land Pattern Name=QFN50P500X500X55-32, Lead Free=Yes, Manufacturer Part Number=STM32L432KBU6, Memory Size=128KBytes, Memory Type=FLASH, Number Of A/D Converters=1, Number Of Adc Channels=10, Number Of Cores=1, Number Of I2C Channels=2, Number Of I/Os=26, Number Of Spi Channels=2, Number Of Timers/Counters=8, Number Of Uart Channels=1, Octopart=https://octopart.com/stm32l432kbu6-stmicroelectronics-74568735, Ram Size=64KBytes, RoHS=TRUE, Temperature Range High=+85°C, Temperature Range Low=-40°C
U2: library part CMP-0133-00007-1, "Stand-Alone System Load Sharing and Li-Ion/Li-Polymer Battery Charge Management Controller, 4.35V, 20-Pin QFN, Industrial Temperature", DatasheetVersion="revB, May-2009", PackageDescription="20-Lead Plastic Quad Flat, No Lead Package (ML) - 4x4x0.9 mm Body [QFN]", PackageReference=QFN-ML20, PackageVersion="revBB, Aug-2009"
U3: library part CMP-2000-06859-1, "Single Chip Transceiver, 2.4 GHz, 60 mW, 1.9 to 3.6 V, -40 to 85 degC, 20-Pin QFN, RoHS, Tray", Current - Receiving=12.6mA~13.5mA, Current - Transmitting=7mA~11.3mA, Frequency=2.4GHz, Manufacturer="Nordic Semiconductor", Operating Temperature=-40°C~85°C, Package / Case=20-VFQFNExposedPad, Package Description="20-Pin Quad Flat No-lead Package, Body 4 x 4 mm, Pitch 0.5 mm", Package Reference=QFN20, Power - Output=0dBm, Standard Package=490, Voltage - Supply=1.9V~3.6V, Category=RF/IFandRFID, Data Rate (Max)=2Mbps, Datasheet URL=http://www.nordicsemi.com/eng/content/download/2726/34069/file/nRF24L01P_Product_Specification_1_0.pdf, Datasheet Version="Rev. 1.0, 09/2008", Design Resources=DevelopmentToolSelector, Family=RFTransceiverICs, For Use With=1490-1002-ND-KITEVALUATIONNRF24L01P1568-1295-ND-SPARKFUNTRANSCEIVERBREAKOUT-1568-1296-ND-SPARKFUNTRANSCEIVERBREAKOUT-1471-1410-ND-DEVBOARDNRFSCLICKNRF24L01P-MODULE-PCB-ND-KITEVALNRF24L01+PCBANTENNANRF24L01P-MODULE-SMA-ND-KITEVALNRF24L01+SMACONNNRF24L01P-UPGRADE-ND-UPGRADE2PCB/1SMANRF24L01103990038-ND-DEVDUINOSENSORNODEV1.3103990053-ND-DEVDUINOSENSORNODEV2(ATMEGA103990074-ND-DEVDUINOSENSORNODE106990026-ND-ENERGYMONITORSHIELDV2113990088-ND-WIRELESSGATESHIELD113990095-ND-DEVDUINOSENSORNODEV3(ATMEGA106030001-ND-ENERGYMONITORSHIELD1597-1361-ND-DEVDUINOSENSORNODEV2.2(ATMEG105990030-ND-RGBWSTRIPWIRELESSSHIELDV1.0, GPIO=-, Manufacturer URL=http://www.nordicsemi.com/eng/Products/, Memory Size=-, Modulation=GFSK, Mounting Technology=SurfaceMount, Online Catalog=nRF24L01+, Other Names=1490-1019, Packaging=Tray, Protocol=-, RF Family/Standard=GeneralISM>1GHZ, Sensitivity=-94dBm, Serial Interfaces=SPI, Series=-, Type=TxRxOnly
U4: library part CMP-2000-05073-3, "SENSOR PRESSURE HUMIDITY TEMP", Case/Package=LGA, Max Operating Temperature=85°C, Min Operating Temperature=-40°C, Accuracy=3%, Lead Free="Lead Free", Mount="Surface Mount", Number of Pins=8, Output Type=SPI, Packaging="Cut Tape", Response Time=1s, Sensor Type=Temperature
Y1: library part CMP-18717-000287-1, "Crystal 16MHz, 10ppm, 9pF, 60Ω", Case/Package=SMD/SMT, ESR (Equivalent Series Resistance)=50R, Frequency=16MHz, Frequency Stability=10ppm, Load Capacitance=9pF, Max Operating Temperature=75°C, Min Operating Temperature=-20°C, Frequency Tolerance=10ppm, Height=0.031inch, Length=0.126inch, Mount="Surface Mount", Packaging="Tape and Reel", Width=0.098inch

## Free pads (board coordinates)
  round 1.152 hole 1.152 unplated: TH(92,61) TH(138,61) TH(138,85.5)

## Via types
v1: diameter 0.45, hole 0.3, Top Layer to Bottom Layer, tented both sides, 276 vias
v2: diameter 0.45/0.45/0.45/0.45 (per signal layer), hole 0.3, Top Layer to Bottom Layer, tented both sides, 2 vias

## Nets (pads, with @x,y where several pads share a name; then routed paths per layer and width w, separated by ;. In a path a pad name is that pad's centre, name@x,y a point inside that pad or via, vN(x,y) a via of type N, cw(c..) or ccw(c..) an arc to the next point about the centre after c; other vN are vias at no path point)
+3.3V: B1.2 C8.1 C9.1 C10.1 C14.1 C18.1 C19.1 C20.1 C21.1 C22.1 D7.A J4.2 J6.1 P1.1 R14.2 R15.2 R16.2 SW3.2 U1.1 U1.5 U1.17 U3.7 U3.15 U3.18 U4.2 U4.5 U4.6 U4.8 | length 15.5
  Top Layer w0.25: SW3.2 116.122,84.051 116.122,82.979 v1(116.135,82.966) ; U4.2 118.94,80.603 119.596,80.603 v1(119.6,80.6) ; C20.1@121.05,70.9 121.05,71.36 121.405,71.715 121.405,71.781 121.505,71.881 U3.7 ; C18.1@121.918,76.993 C18.1 ; U3.18 C18.1@122.005,76.92 ; U3.15@123.877,74.978 C19.1@123.877,76.902
  Top Layer w0.3: C10.1 111.76,70.56 111.915,70.715 U1.17 ; v1@112.214,77 112.239,77.025 C9.1 113.415,76.61 U1.5 ; U1.1 115.415,76.16 115.8,76.545 C8.1@115.8,77.175 ; C20.1@120.99,70.76 120.99,70.31 v1(121,70.3) ; v1(121.418,76.991) v1@121.422,76.986 ; C19.1@123.877,76.902 C19.1
  Top Layer w0.35: v1@121.42,76.993 C18.1@121.918,76.993
  Top Layer w0.4: C10.1@111.79,69.947 111.79,69.359 v1(111.82,69.33)
  Top Layer w0.5: D7.A v1(102.3,69.9)
  Top Layer w0.6: v1(121.9,83.1) R15.2 ; R14.2 v1(128.5,83.1)
  other v1: 123.7,75.8 112.2,77 116.134,79.196
ANT1: L1.1 L2.1 U3.12 | length 4.5
  Top Layer w0.25: U3.12 124.556,73.456 124.971,73.041
  Top Layer w0.357: 124.971,73.041 L1.1 ; L1.1@126.542,73.041 126.701,72.882 L2.1
ANT2: L1.2 L3.1 U3.13 | length 4.4
  Top Layer w0.25: U3.13 124.556,73.956
  Top Layer w0.357: 124.641,74.041 L1.2 ; L1.2@126.542,74.041 127.05,74.549 L3.1
ANT2_2: C5.2 L3.2 | length 1.5
  Top Layer w0.357: L3.2 C5.2
ANT2_SMA: C5.1 C6.2 J3.1 | length 6
  Top Layer w0.357: C5.1 131.695,74.553 C6.2@133.219,74.553 ; C6.2 137.66,74.557 J3.1
BOOT0_SW: R3.1 SW3.1 | length 8
  Top Layer w0.3: R3.1 118.008,77.008 118.008,77.682 v1(118.016,77.69) ; v1(119.071,82.945) 119.081,82.955 119.081,83.769 SW3.1@119.074,83.776
  Bottom Layer w0.3: v1(118.016,77.69) 117.524,78.182 117.413,78.182 117.106,78.489 117.106,80.979 v1(119.071,82.945)
CE: R17.1 U2.17 | length 3.9
  Top Layer w0.25: R17.1 96.65,78.7 97.15,79.2 98.9,79.2 99.5,79.8 U2.17
CHARGED: R7.1 U2.8 | length 8
  Top Layer w0.25: U2.8 100,85.1 100.6,85.7 R7.1
CHARGED_K: D5.K R7.2 | length 1.6
  Top Layer w0.25: R7.2 D5.K
CHARGING: R8.1 U2.7 | length 7.2
  Top Layer w0.25: U2.7 100.5,84.6 100.725,84.825 104.575,84.825 105.3,84.1 R8.1
CHARGING_K: D6.K R8.2 | length 1.6
  Top Layer w0.25: R8.2 D6.K
DVDD: C7.2 U3.19 | length 1.7
  Top Layer w0.25: C7.2 120.6,77.05 120.775,76.875 120.825,76.875 121.505,76.195 U3.19
GND: B1.1 C1.1 C2.1 C3.1 C4.1 C6.1 C7.1 C8.2 C9.2 C10.2 C11.1 C12.2 C13.2 C14.2 C15.1 C16.2 C17.2 C18.2 C19.2 C20.2 C21.2 C22.2 C23.1 D3.2 J1.5 J2.2 J3.2 J4.1 J9.1 P1.3 P1.5 P1.9 R2.1 R4.1 R5.1 R9.1 R10.1 R11.1 R12.1 R13.1 SW1.1 SW2.1 SW3.3 SW3.4 SW3.5 SW3.6 SW3.7 U1.16 U1.32 U1.33 U2.3 U2.10 U2.11 U2.21 U3.8 U3.14 U3.17 U3.20 U3.21 U4.1 U4.7 Y1.2 Y1.4 | length 40.1
  Top Layer w0.25: v2(94.731,66.139) SW1.1 ; v2(94.847,60.448) 95.678,60.448 SW2.1 ; U2.10 U2.10@99,84.425 ; U2.3 R11.1@103.85,82.25 ; C23.1 103.371,73.182 v1@104.001,73.182 ; SW3.5@113.133,84.849 113.149,84.864 v1(113.149,85.821) 113.149,86.442 SW3.7@113.133,86.457 ; SW3.3 114.579,83.771 114.615,83.735 114.612,83.732 114.613,83.731 114.613,82.969 v1(114.617,82.965) ; C16.2 v1(114.975,77.975) ; 119.6,76.4 120.194,75.806 U3.20 ; SW3.4 120.504,84.598 120.504,84.849 120.485,84.867 v1(120.485,85.8) 120.485,86.755 SW3.6 ; C20.2@121.9,70.875 122.005,70.98 U3.8 ; C18.2 C18.2@121.995,77.945 ; Y1.4@122.094,67.103 v1(122.094,67.57) ; U3.17 122.505,76.031 122.586,76.112 122.586,76.424 v1(122.605,76.443) ; C1.1 123.8,64.453 Y1.2@124.275,64.928 ; U3.14 124.358,74.456 124.52,74.618 v1@124.52,74.623 ; Y1.2@124.19,64.928 Y1.2@124.275,64.928 ; Y1.2 Y1.2@124.275,64.928 ; Y1.2@124.64,65.278 124.657,65.295 v1(125.326,65.295) 125.334,65.287 126.61,65.287 C2.1 ; C3.1 C3.1@130.681,71.868
  Top Layer w0.3: U1.32@116,75.41 U1.32 116.165,75.41 116.165,75.865 116.8,76.5 C8.2@116.8,77.175 ; C8.2 116.85,77.275 116.85,77.583 117.807,78.541 v1@118.089,78.541
  Top Layer w0.35: U4.7 v1@117.688,80.607
  Top Layer w0.357: R11.1@103.874,82.226 R11.1@103.925,82.277 ; C10.2 C10.2@110.821,69.966 ; v1(121.93,70.277) C20.2@121.93,70.77 ; 130.681,69.482 C3.1@130.681,71.868 ; C6.1 v1(133.223,76.523) ; J3.2@136.2,71.028 J3.2@137.021,71.849 ; J3.2@136.3,78.07 J3.2@137.121,77.249 ; 137.668,69.319 J3.2@137.668,71.849 ; J3.2@137.668,77.249 137.668,79.976 ; J3.2@138.379,71.849 J3.2@139.2,71.028 ; J3.2@138.479,77.249 J3.2@139.2,77.97
  Top Layer w0.4: v1(97.157,73.194) 97.163,73.2 D3.2
  Top Layer w0.45: v1(124.548,74.632) 125.07,75.155
  other v1: 91.5,60 93,60 97.5,60 103.5,60 105,60 106.5,60 108,60 109.5,60 111,60 112.5,60 117,60 118.5,60 120,60 121.5,60 123,60 124.5,60 126,60 127.5,60 129,60 130.5,60 132,60 133.5,60 135,60 136.5,60 93.75,61.5 96.75,61.5 101.25,61.5 119.25,61.5 120.75,61.5 122.25,61.5 123.75,61.5 125.25,61.5 126.75,61.5 128.25,61.5 129.75,61.5 131.25,61.5 132.75,61.5 134.25,61.5 135.75,61.5 91.5,63 93,63 94.5,63 96,63 97.5,63 99,63 100.5,63 105,63 120,63 121.5,63 126,63 127.5,63 129,63 130.5,63 132,63 133.5,63 135,63 136.5,63 138,63 92.25,64.5 93.75,64.5 95.25,64.5 96.75,64.5 98.25,64.5 99.75,64.5 101.25,64.5 119.25,64.5 120.75,64.5 128.25,64.5 129.75,64.5 131.25,64.5 132.75,64.5 134.25,64.5 135.75,64.5 137.25,64.5 138.75,64.5 91.5,66 93,66 97.5,66 100.5,66 103.5,66 105,66 109.5,66 111,66 112.5,66 114,66 115.5,66 120,66 127.5,66 129,66 130.5,66 132,66 133.5,66 135,66 136.5,66 138,66 92.25,67.5 93.75,67.5 96.75,67.5 98.25,67.5 99.75,67.5 104.25,67.5 105.75,67.5 108.75,67.5 117.75,67.5 119.25,67.5 126.75,67.5 128.25,67.5 129.75,67.5 131.25,67.5 132.75,67.5 134.25,67.5 135.75,67.5 137.25,67.5 138.75,67.5 93,69 94.5,69 96,69 99,69 100.5,69 105,69 111,69 115.5,69 118.5,69 120,69 124.5,69 126,69 127.5,69 129,69 130.5,69 132,69 133.5,69 135,69 136.5,69 138,69 113.23,69.191 119.004,70.156 96.75,70.5 125.25,70.5 109.898,70.821 116.936,71.134 118.387,71.253 99.428,71.316 101.515,71.353 124.343,71.41 93,72 96,72 112.4,72.4 114.1,72.4 118.881,72.395 104.014,73.17 113.2,73.2 114.939,73.208 121.455,73.406 122.555,73.406 105.94,73.759 118.053,73.97 112.4,74.1 114.1,74.1 121.455,74.506 122.555,74.506 99.25,74.785 113.2,74.9 114.9,74.9 93,75 102,75 105,75 119.111,75.782 93.75,76.5 125.25,76.5 101.836,77.635 91.5,78 106.5,78 108,78 111,78 126,78 127.5,78 121.07,78.249 118.099,78.55 113.25,79.5 126.75,79.5 128.25,79.5 117.902,80.595 108,81 124.5,81 127.5,81 129,81 130.5,81 132,81 133.5,81 135,81 136.5,81 138,81 122.8,81.111 99.45,81.7 100.55,81.7 105.145,82.025 95.25,82.5 113.25,82.5 120.75,82.5 125.25,82.5 129.75,82.5 131.25,82.5 132.75,82.5 134.25,82.5 135.75,82.5 137.25,82.5 138.75,82.5 117.434,82.579 99.45,82.8 100.55,82.8 94.5,84 130.5,84 132,84 133.5,84 135,84 136.5,84 138,84 92.25,85.5 93.75,85.5 95.25,85.5 122.25,85.5 125.25,85.5 134.25,85.5 135.75,85.5 116.859,86.479 97.705,86.726 101.812,86.722 105.916,86.707 108.798,86.726 99.754,86.73 103.754,86.732
I2C1_SCL: J4.3 R14.1 U1.19 U4.4 | length 31.5
  Top Layer w0.3: U1.19 112.915,70.172 v1(112.93,70.157) ; U4.4 v1(119.593,79.307) ; J4.3 126.48,85.28 126.48,83.12 R14.1
  Bottom Layer w0.3: v1(112.93,70.157) 112.97,70.157 113.427,69.7 117.8,69.7 120.139,72.039 120.139,78.748 119.593,79.293 v1(119.593,79.307) 124.407,79.307 126.46,81.36 J4.3
I2C1_SDA: J4.4 R15.1 U1.20 U4.3 | length 24.4
  Top Layer w0.3: v1(113.415,70.515) U1.20 ; U4.3 118.944,79.964 119.596,79.964 v1(119.602,79.971) ; R15.1 123.91,83.11 J4.4@123.91,85.29
  Bottom Layer w0.3: v1(113.415,70.515) 115.015,70.515 116,71.5 116,74.615 118.843,77.458 118.843,79.616 119.198,79.971 v1(119.602,79.971) ; v1@119.591,79.971 120.371,79.971 123.9,83.5 123.9,85.28 J4.4
IREF: R2.2 U3.16 | length 3.6
  Top Layer w0.25: R2.2@122.83,79.2 122.85,79.2 123.025,79.025 123.025,78.988 123.135,78.879 123.135,76.161 123.005,76.031 U3.16
LED_RX: D2.A U1.9 | length 2
  Top Layer w0.25: D2.A@109.6,74.75 110.26,75.41 U1.9
LED_RX_K: D2.K R5.2 | length 1.6
  Top Layer w0.5: R5.2 D2.K
LED_TX: D1.A U1.8 | length 2.6
  Top Layer w0.25: D1.A 111.525,76.4 111.74,76.185 111.89,76.185 111.915,76.16 U1.8
LED_TX_K: D1.K R4.2 | length 1.6
  Top Layer w0.5: R4.2 D1.K
NetD7_K: D7.K R13.2 | length 1.6
  Top Layer w0.5: R13.2 D7.K
NRF_CE: U1.30 U3.1 | length 4.4
  Top Layer w0.25: U1.30 116.81,74.41 117.356,74.956 U3.1
NRF_IRQ: U1.25 U3.6 | length 5
  Top Layer w0.25: U1.25 U3.6@121.005,71.91
NRF_SPI3_ICS: U1.29 U3.2 | length 4.4
  Top Layer w0.25: U1.29 117.01,73.91 117.556,74.456 U3.2
NRST: C16.1 P1.10 R16.1 R18.1 U1.4 | length 29.1
  Top Layer w0.3: R18.1 102.353,60.363 P1.10 ; U1.4 113.915,76.415 114,76.5 C16.1@114,77.175 ; C16.1 v1(114.025,77.975) ; v1@114.025,77.989 114.3,78.264 R16.1
  Bottom Layer w0.3: P1.10 102.3,63.55 102.3,67.5 109,74.2 110.9,74.2 111.4,74.7 111.4,75.35 v1@114.015,77.965
NRST_SW: R18.2 SW2.2 | length 1.3
  Top Layer w0.3: SW2.2@99.182,60.363 R18.2
NTE: R12.2 U2.9 | length 1.3
  Top Layer w0.25: U2.9 R12.2@99.5,85.5
PA7: P1.7 U1.13 | length 12
  Top Layer w0.3: v1(110.664,73.482) 110.678,73.482 110.75,73.41 U1.13
  Bottom Layer w0.3: P1.7@106.5,64.51 106.5,70.3 109.682,73.482 v1(110.664,73.482)
PA8: P1.8 U1.18 | length 23.6
  Top Layer w0.25: v1@112.368,70.522 112.415,70.57 U1.18
  Bottom Layer w0.3: P1.8 107.69,60.7 116.103,60.7 116.279,60.876 116.279,66.602 115.649,67.231 113.671,67.231 112.405,68.498 112.405,70.352 112.396,70.361 112.396,70.467 v1(112.368,70.495)
PB0: P1.6 U1.14 | length 13.3
  Top Layer w0.3: v1(110.671,72.844) 110.685,72.844 110.751,72.91 U1.14
  Bottom Layer w0.3: P1.6 107.8,63.13 107.8,69.973 v1(110.671,72.844)
PH3/BOOT0: R3.2 U1.31 | length 2.4
  Top Layer w0.3: U1.31 116.41,74.91 117.352,75.852 117.852,75.852 R3.2
POWER_GOOD: R6.1 U2.6 | length 6.6
  Top Layer w0.25: U2.6 104.1,84.2 105.8,82.5 R6.1
POWER_GOOD_K: D4.K R6.2 | length 1.6
  Top Layer w0.25: R6.2 D4.K
PROG1: R9.2 U2.13 | length 2.3
  Top Layer w0.15: R9.2 96.45,83.5 97.113,82.838 97.113,82.688 97.55,82.25 U2.13
PROG3: R10.2 U2.12 | length 3.1
  Top Layer w0.15: R10.2 96.45,85 96.675,84.775 96.675,84.725 97.475,83.925 97.475,83.1 97.825,82.75 U2.12
SPI3_MISO: U1.27 U3.5 | length 4.2
  Top Layer w0.25: U1.27 117.51,72.91 117.556,72.956 U3.5
SPI3_MOSI: U1.28 U3.4 | length 4.2
  Top Layer w0.25: U1.28 117.31,73.41 117.356,73.456 U3.4
SPI3_SCK: U1.26 U3.3 | length 5.3
  Top Layer w0.25: U1.26 116.02,72.405 118.095,72.405 v1(118.1,72.4) ; v1(118.766,73.956) U3.3
  Bottom Layer w0.25: v1(118.1,72.4) 118.766,73.066 v1(118.766,73.956)
SRN_SW: SW1.2 U1.10 | length 16.1
  Top Layer w0.3: SW1.2 v1(99.744,66.139) ; v1(110.61,74.91) U1.10
  Bottom Layer w0.3: v1(99.744,66.139) 99.754,66.148 99.754,66.354 108.31,74.91 v1(110.61,74.91)
SYS_JTCK-SWCLK: P1.4 U1.24 | length 18.3
  Top Layer w0.3: P1.4 112.87,60.6 116.6,60.6 118.4,62.4 118.4,68.175 115.415,71.16 U1.24
SYS_JTCK-SWDIO: P1.2 U1.23 | length 11.1
  Top Layer w0.3: P1.2 116.59,64.44 116.59,68.81 114.915,70.485 U1.23
THERM: R11.2 U2.5 | length 2.2
  Top Layer w0.25: U2.5 102.175,83.25 102.175,83.328 102.321,83.475 103.725,83.475 R11.2
USB_CONN_D_N: D3.1 J1.2 | length 4.2
  Top Layer w0.25: J1.2 94.341,73.477 94.921,73.477 94.945,73.453 95.468,73.453 95.472,73.449 96.397,73.449 97.098,74.15 D3.1
USB_CONN_D_P: D3.3 J1.3 | length 4.2
  Top Layer w0.25: J1.3 94.341,72.931 94.921,72.931 94.945,72.955 95.262,72.955 95.266,72.951 96.374,72.951 97.075,72.25 D3.3
USB_D_N: D3.6 U1.21 | length 19.1
  Top Layer w0.25: D3.6 103.809,74.15 104.559,73.4 105.3,73.4 111.002,67.698 113.194,67.698 113.916,68.421 113.916,68.997 113.916,69.909 U1.21@113.916,71.309
USB_D_P: D3.4 U1.22 | length 19.9
  Top Layer w0.25: D3.4 103.912,72.25 104.564,72.902 105.094,72.902 110.795,67.2 113.4,67.2 114.414,68.214 U1.22@114.414,71.309
VBAT: C13.1 J2.1 U2.14 U2.15 U2.16
VBUS: C15.2 C23.2 D3.5 F1.1 J1.1 J5.1 | length 5.8
  Top Layer w0.295: D3.5 D3.5@100.656,73.194
  Top Layer w0.35: D3.5@100.656,73.194 101.644,73.194 v1(101.652,73.185) ; v1@101.657,73.19 102.353,73.19 C23.2
  Top Layer w0.4: v1(100,75.7) C15.2
  Bottom Layer w0.35: v1(100,75.7) 100,74.837 v1(101.652,73.185)
VBUS_FILTERED: B1.3 C17.1 FB1.2
VBUS_FUSED: C11.2 D4.A D5.A D6.A F1.2 J7.1 R17.2 U2.2 U2.4 U2.18 U2.19 | length 6.5
  Top Layer w0.25: U2.2 v1@102.722,81.75 ; U2.4 v1@102.735,82.75 ; D4.A v1(111.5,82.5) ; D6.A v1(111.5,84.1) ; D5.A v1(111.5,85.7)
  Top Layer w0.5: J7.1 J7.1@94.894,77.74
  Top Layer w0.6: J7.1@94.962,77.7 R17.2
  other v1: 99.268,78.502 100.229,79.571 102.759,81.672 102.774,82.843
VBUS_MCP_OUT: C12.1 FB1.1 J8.1 U2.1 U2.20
VDD_PA: C3.2 C4.2 L2.2 U3.11 | length 7.6
  Top Layer w0.25: U3.11 U3.11@123.973,72.956
  Top Layer w0.357: 124.129,72.8 125.047,71.882 L2.2 C3.2 129.681,71.868 C4.2@129.681,70.363
XC1: C2.2 R1.2 U3.10 Y1.3 | length 8.3
  Top Layer w0.25: U3.10@123.005,71.881 123.563,71.323 R1.2 123.563,68.776 124.29,68.049 Y1.3 124.64,66.278 C2.2
XC2: C1.2 R1.1 U3.9 Y1.1 | length 11.1
  Top Layer w0.25: R1.1@122.447,68.826 121.626,68.826 120.8,68 120.8,66.118 121.515,65.403 121.99,64.928 Y1.1 122.09,63.66 C1.2@122.8,62.95 ; R1.1@122.505,68.884 U3.9
pads on no net: J1.4 J1.6 J1.7 J1.8 J1.9 J1.10 J1.11 SW3. U1.2 U1.3 U1.6 U1.7 U1.11 U1.12 U1.15

## Polygon pours and split planes (outlines as drawn)
GND on Top Layer "GND_L01_P026" (solid, pour order 26): 140.033,69.693 126.715,69.693 123.316,73.092 129.743,79.519 140.033,79.519 140.033,85.813 ccw(c138.327,85.813) 139.533,87.02 ccw(c138.327,85.814) 138.326,87.52 91.74,87.52 ccw(c91.74,85.814) 90.533,87.02 ccw(c91.74,85.813) 90.033,85.813 90.033,60.727 ccw(c91.74,60.727) 90.533,59.52 ccw(c91.74,60.727) 91.74,59.02 138.326,59.02 ccw(c138.326,60.727) 139.533,59.52 ccw(c138.327,60.727) 140.033,60.727
+3.3V on Top Layer "GND_L01_P-001" (solid, pour order 2): 115.049,79.578 115.074,79.552 115.586,79.552 115.586,79.567 115.824,79.805 115.814,79.816 115.814,81.465 117.132,81.465 117.138,81.46 117.138,81.082 116.641,81.082 116.522,80.964 116.28,80.964 116.28,80.126 117.138,80.126 117.138,78.788 116.051,77.701 116.051,76.9 115.6,76.9 115.6,78.3 115,78.9 115,79.529
+3.3V on Top Layer "GND_L01_P-001" (solid, pour order 3): 109.344,81.587 112.65,81.587 112.65,79.543 112.607,79.5 109.5,79.5 109.344,79.656
GND on Top Layer "GND_L01_P-001" (solid, pour order 27): 109.697,69.4 110.27,69.802 110.608,69.731 110.724,69.706 113.608,69.997 113.608,68.599 113.028,68.02 111.077,68.02
GND on Top Layer "GND_L01_P-001" (solid, pour order 19): 95.4,72.25 95.65,72.5 95.85,72.5 96.3,72.5 96.6,72.2 96.6,71.6 98,70.2 98,69.6 96.9,69.6 95.1,71.4 93.7,71.4 93.7,71.8 95.2,71.8 95.4,72
GND on Top Layer "GND_L01_P-001" (solid, pour order 12): 95,82.3 94.04,83.26 92.519,83.26 92.519,86.3 98.2,86.3 98.6,85.9 98.6,85.1 99.1,84.6 99.1,83.9 98.5,83.9 98.3,83.7 98.3,83.2 97.7,83.2 97.7,85.5 97.5,85.7 95.6,85.7 95.6,82.8 96.6,82.8 96.6,82.3
GND on Top Layer "GND_L01_P-001" (solid, pour order 7): 106.3,74.338 106.3,77.1 105.8,77.6 105.8,78.047 102.253,78.047 101.45,78.85 100.7,78.85 100.7,76.247 102.853,76.247 104.762,74.338
GND on Top Layer "GND_L01_P-001" (solid, remove dead copper, pour order 4): 109.4,78.6 109.5,78.5 110.2,78.5 110.945,77.755 113.3,77.755 113.3,79.1 113.6,79.4 113.6,81 113.654,81.054 115.5,81.054 115.5,81.5 113.6,81.5 113.154,81.054 113.154,79.754 112.5,79.1 109.4,79.1
VBUS_FUSED on Top Layer "GND_L01_P-001" (solid, pour order 10): 99.903,79.6 99.025,78.722 97.822,78.722 97.1,78 96.247,78 96.247,77.4 97.1,77.4 97.373,77.673 98.873,77.673 99.348,78.148 100.304,78.148 100.304,78.902 100.577,79.171 100.577,80.53 100.572,80.525 99.903,80.525
VBUS_FILTERED on Top Layer "GND_L01_P-001" (solid, pour order 5): 106.098,80.616 106.098,81.166 105.323,81.166 105.254,81.096 105.254,79.482 105.062,79.292 105.062,78.551 105.8,78.551 106.701,79.452 107.444,79.452 107.444,80.046 106.669,80.046
VBUS on Top Layer "GND_L01_P-001" (solid, pour order 8): 97.184,76.766 96.202,76.766 95.156,75.719 95.178,74.759 94.792,74.373 93.618,74.373 93.618,73.922 95.637,73.922 96.47,74.755 97.482,74.755 98.982,76.255 100.295,76.255 100.295,76.913 97.332,76.913
VBUS_MCP_OUT on Top Layer "GND_L01_P-001" (solid, pour order 6): 104.611,80.211 103.91,79.51 103.91,78.546 102.503,78.546 101.6,79.448 100.875,79.448 100.875,80.654 101.6,80.654 101.6,81.378 102.3,81.378 102.3,81.17 104.611,81.17
VBAT on Top Layer "GND_L01_P-001" (solid, pour order 11): 99.128,80.651 98.449,80.651 98.401,80.699 98.401,81.8 94.257,81.8 93.312,82.745 91.8,82.745 91.8,80.1 92.282,79.618 92.282,79.153 95.853,79.153 96.648,79.948 99.128,79.948
+3.3V on Int2 (PWR) "GND_L01_P-001" (solid, pour order 14): 104.736,81.2 112.9,81.2 112.9,87.157 138.436,87.157 139.636,85.957 139.636,60.557 138.436,59.357 91.636,59.357 90.536,60.457 90.536,74.339 104.736,74.339
VBUS_FUSED on Int2 (PWR) "GND_L01_P-001" (solid, pour order 13): 103.7,82 112.1,82 112.1,87.2 91.2,87.2 90.3,86.3 90.3,77.07 103.7,77.07
GND on Int1 (GND) "GND_L02_P015" (solid, pour order 15): 90.47,59.455 cw(c91.677,60.662) 89.97,60.662 89.97,85.747 cw(c91.677,85.747) 90.47,86.955 cw(c91.677,85.747) 91.677,87.455 138.263,87.455 cw(c138.263,85.747) 139.47,86.955 cw(c138.263,85.747) 139.97,85.747 139.97,60.662 cw(c138.263,60.662) 139.47,59.455 cw(c138.263,60.662) 138.263,58.955 91.677,58.955 cw(c91.677,60.662)
GND on Bottom Layer "GND_L04_P018" (solid, pour order 18): 90.5,59.5 cw(c91.707,60.707) 90,60.707 90,85.793 cw(c91.707,85.793) 90.5,87 cw(c91.707,85.793) 91.707,87.5 138.293,87.5 cw(c138.293,85.793) 139.5,87 cw(c138.293,85.793) 140,85.793 140,60.707 cw(c138.293,60.707) 139.5,59.5 cw(c138.293,60.707) 138.293,59 91.707,59 cw(c91.707,60.707)

## Silkscreen, mask and mechanical layers (free items; w line width, h text height)
Top Overlay:
  drawing of 4 lines, arcs and shapes, not listed
  text "BOOT" at 122.07,84.236 h0.75 r90.08
  text "I2C" at 130.539,81.506 h1.52
  text "SWD" at 103.167,66.486 h1.52
  text "RESET" at 95.67,62.34 h0.75 r359.96
Bottom Overlay:
  text "Version: 0.1" at 134.532,71.646 h1.52
  text "Designer: Corey Harrington" at 134.532,69.524 h1.52

## Text inside footprints (layer, text, board x,y; h text height)
D1: Mechanical 13 "+" at 110.983,75.892 h0.5 r180
D2: Mechanical 13 "+" at 116.083,73.292 h0.5 r180
D4: Mechanical 13 "+" at 111.883,81.992 h0.5 r180
D5: Mechanical 13 "+" at 111.883,85.192 h0.5 r180
D6: Mechanical 13 "+" at 111.883,83.592 h0.5 r180
D7: Mechanical 13 "+" at 97.283,71.692 h0.5 r180
J1: Mechanical 6 "PCB EDGE" at 90.039,80.079 h0.3 r270